# Altium PCB testrack_carrier_debugger.PcbDoc
Units mm, origin at the board's own origin, x right, y up, seen from the top; angles counter-clockwise.
Board outline 172 x 100 mm, 6 copper layers (Top Layer, Signal Layer 1, Signal Layer 2, Signal Layer 3, Signal Layer 4, Bottom Layer), stack 1.54 mm thick; 40 components, 43 nets, 276 pads, 197 vias.
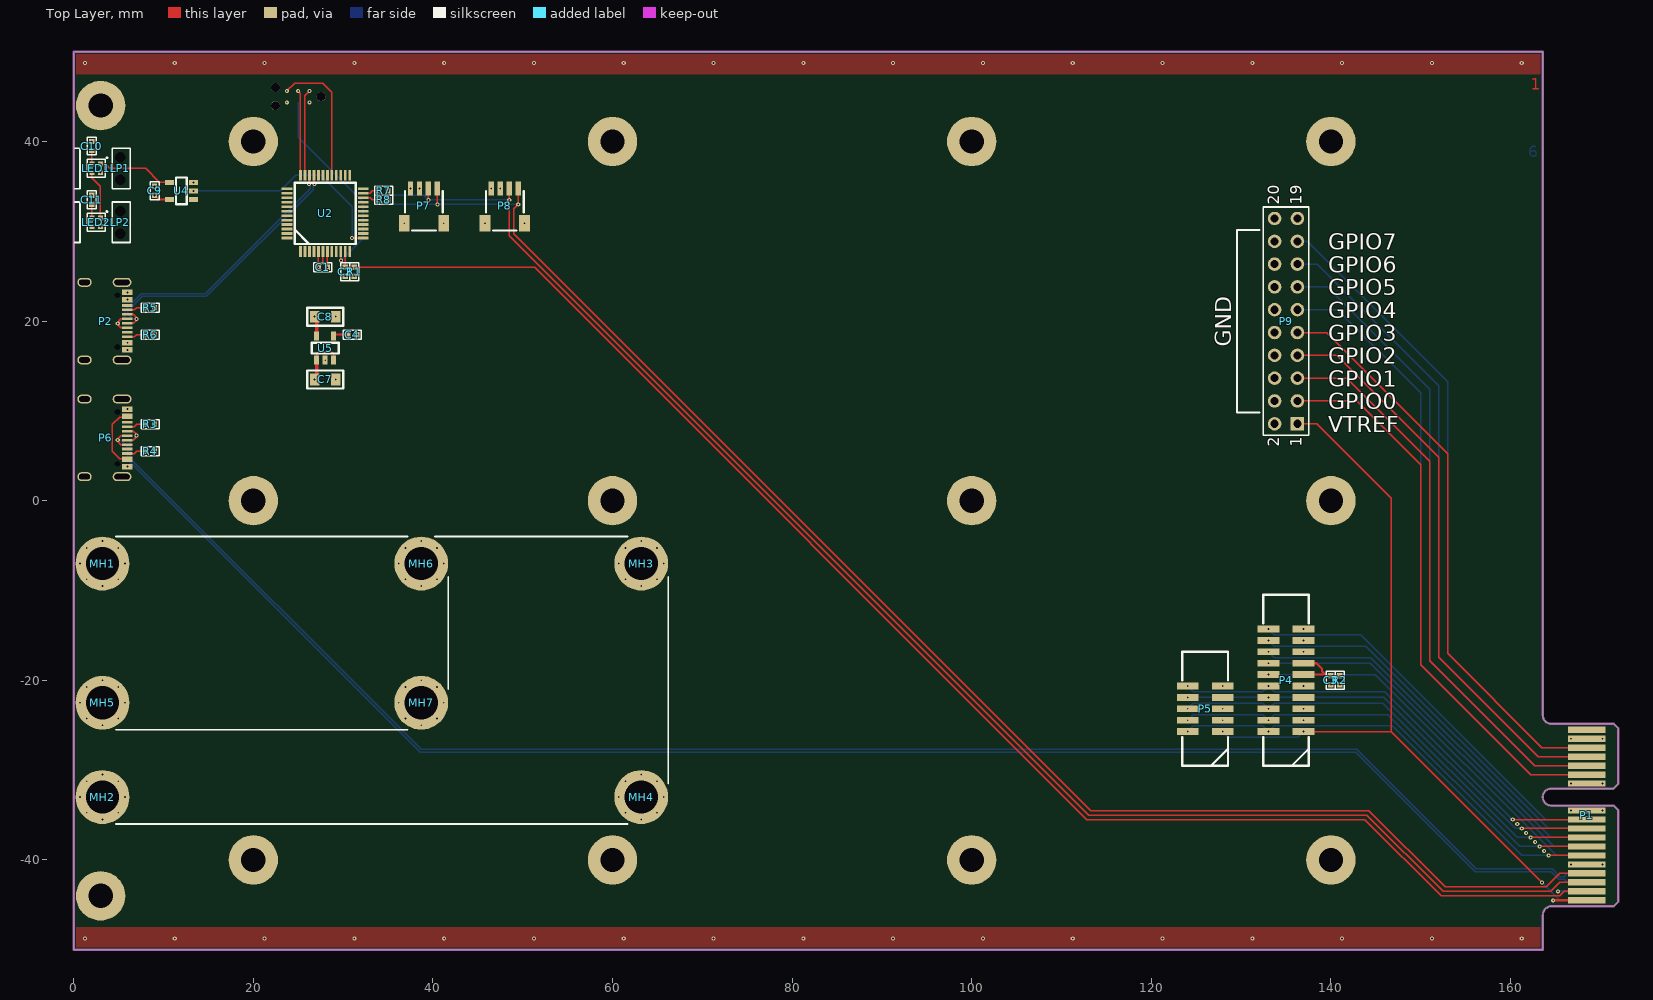
[diagram p0: Top Layer view]
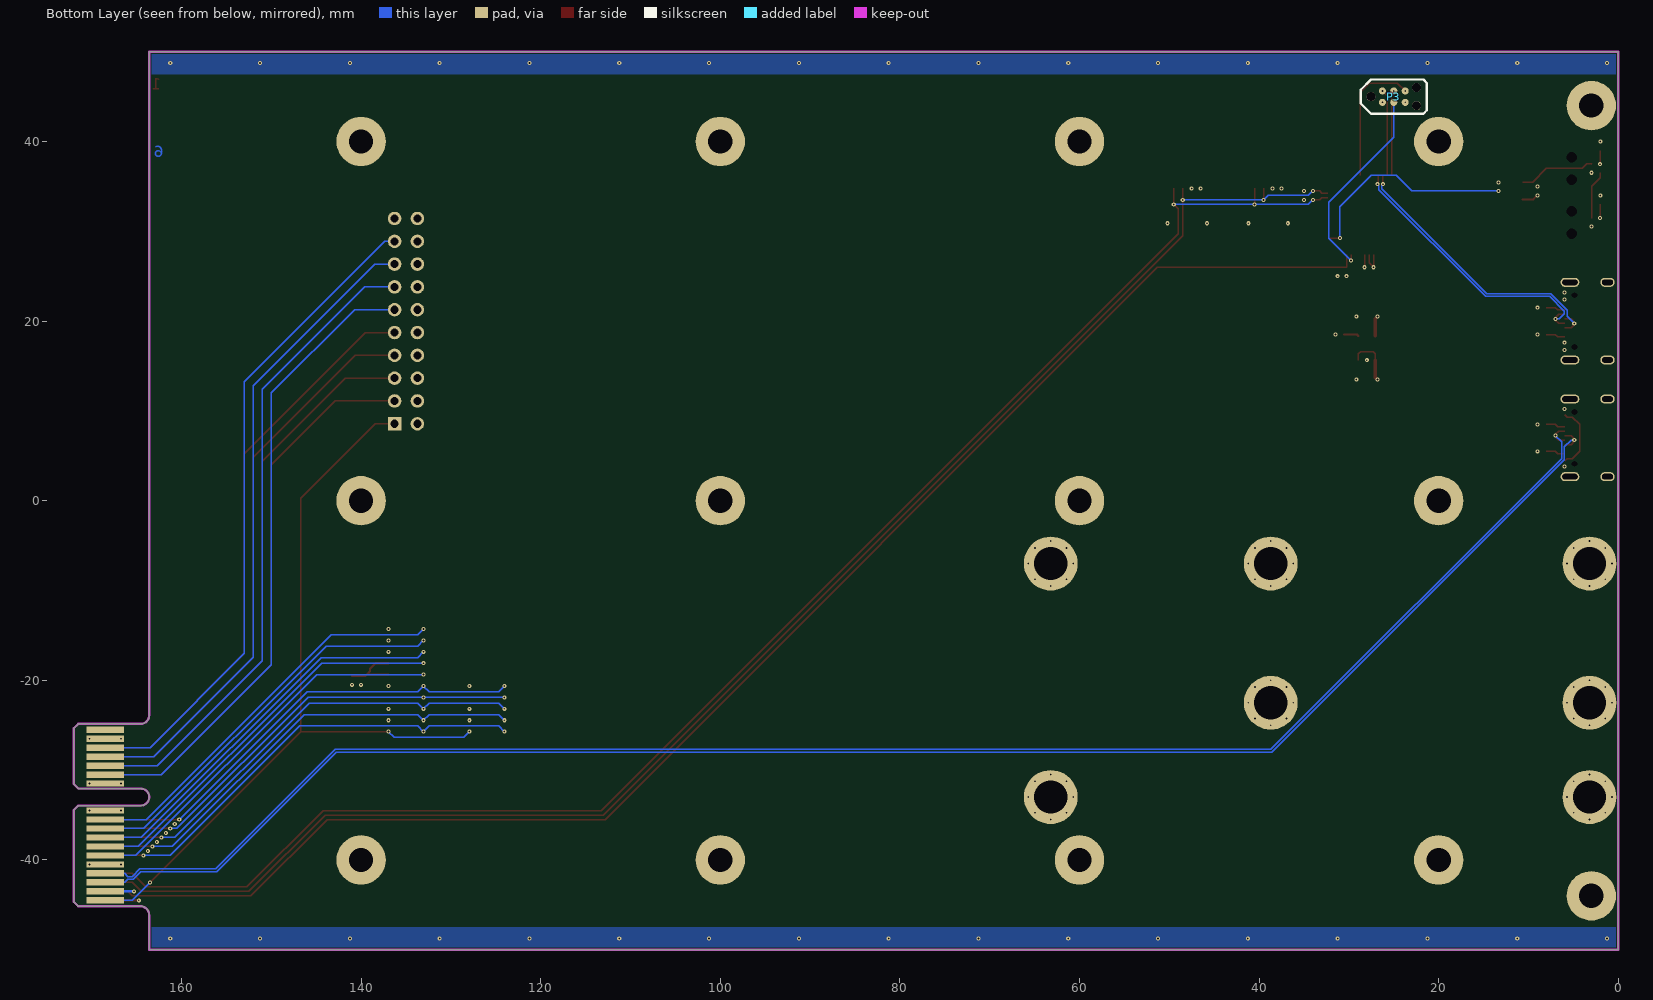
[diagram p1: Bottom Layer view, seen from below]
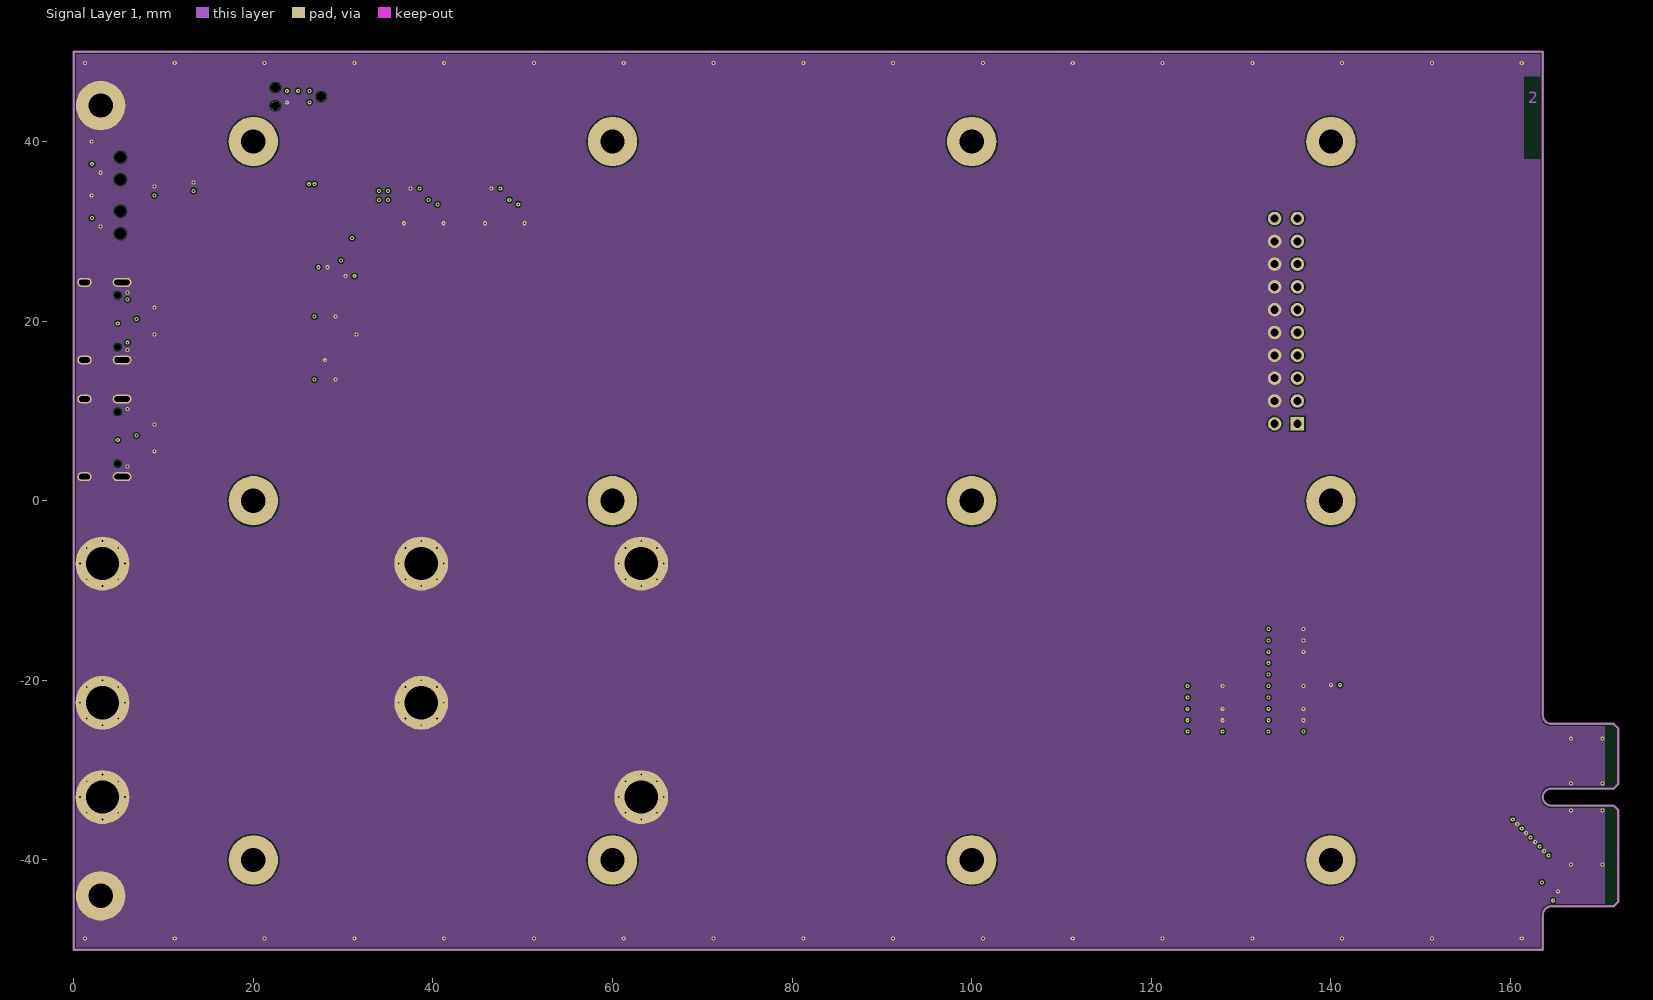
[diagram p2: Signal Layer 1]
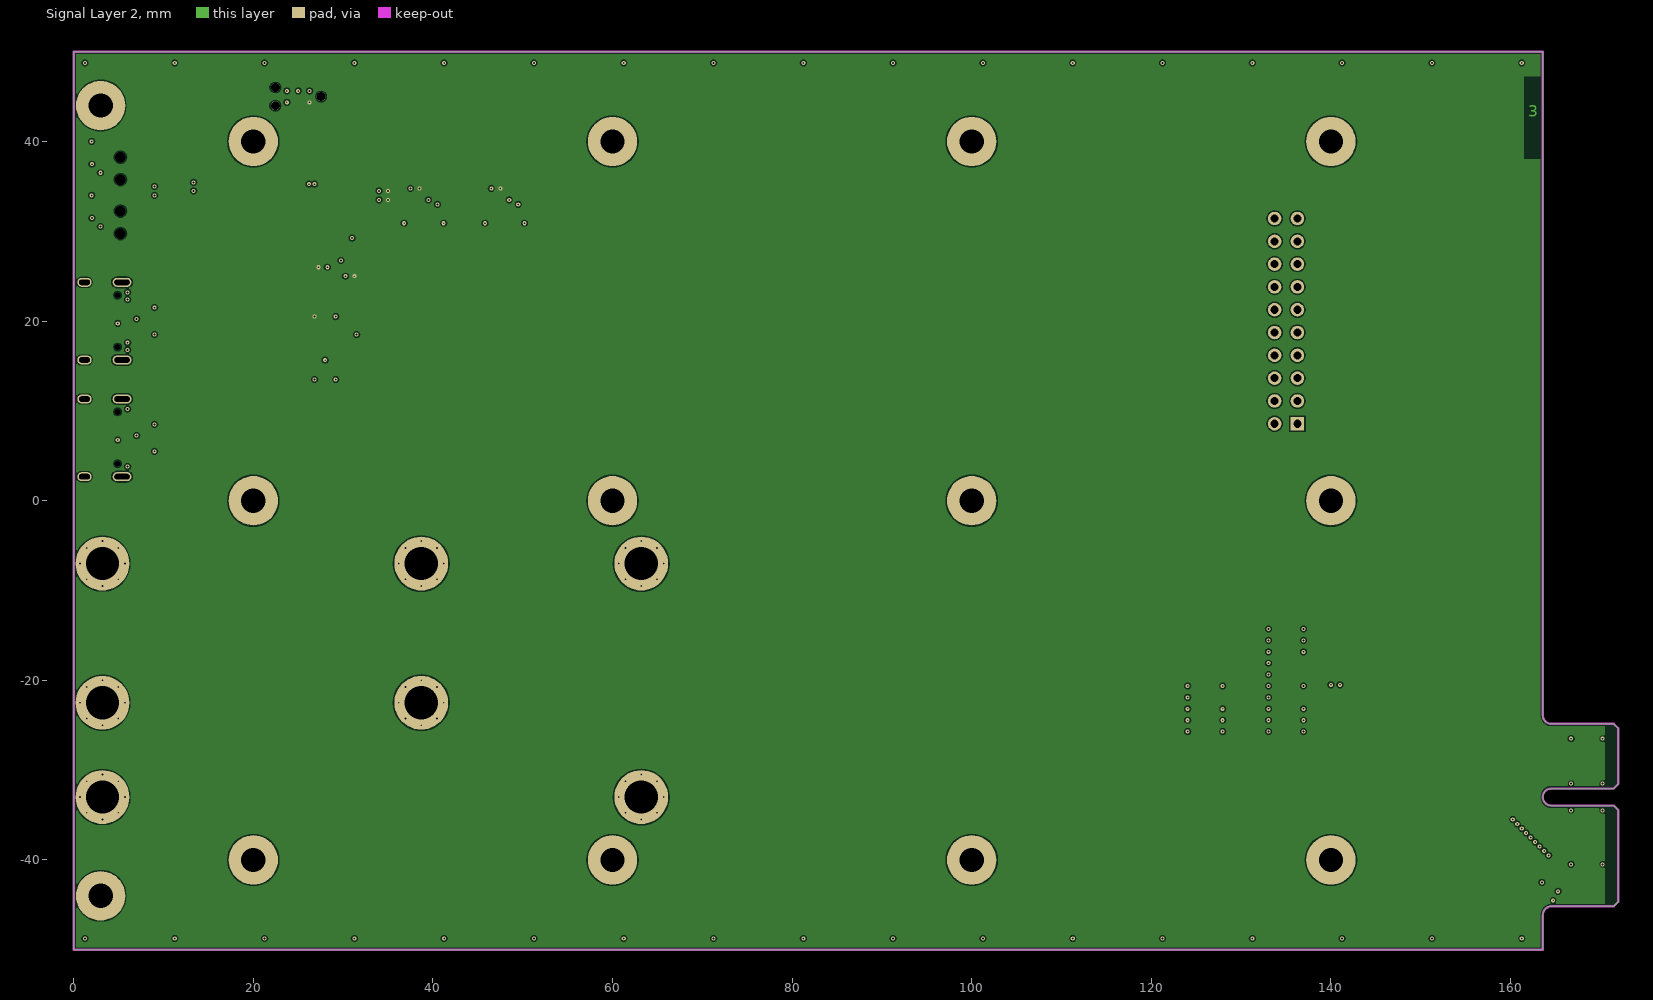
[diagram p3: Signal Layer 2]
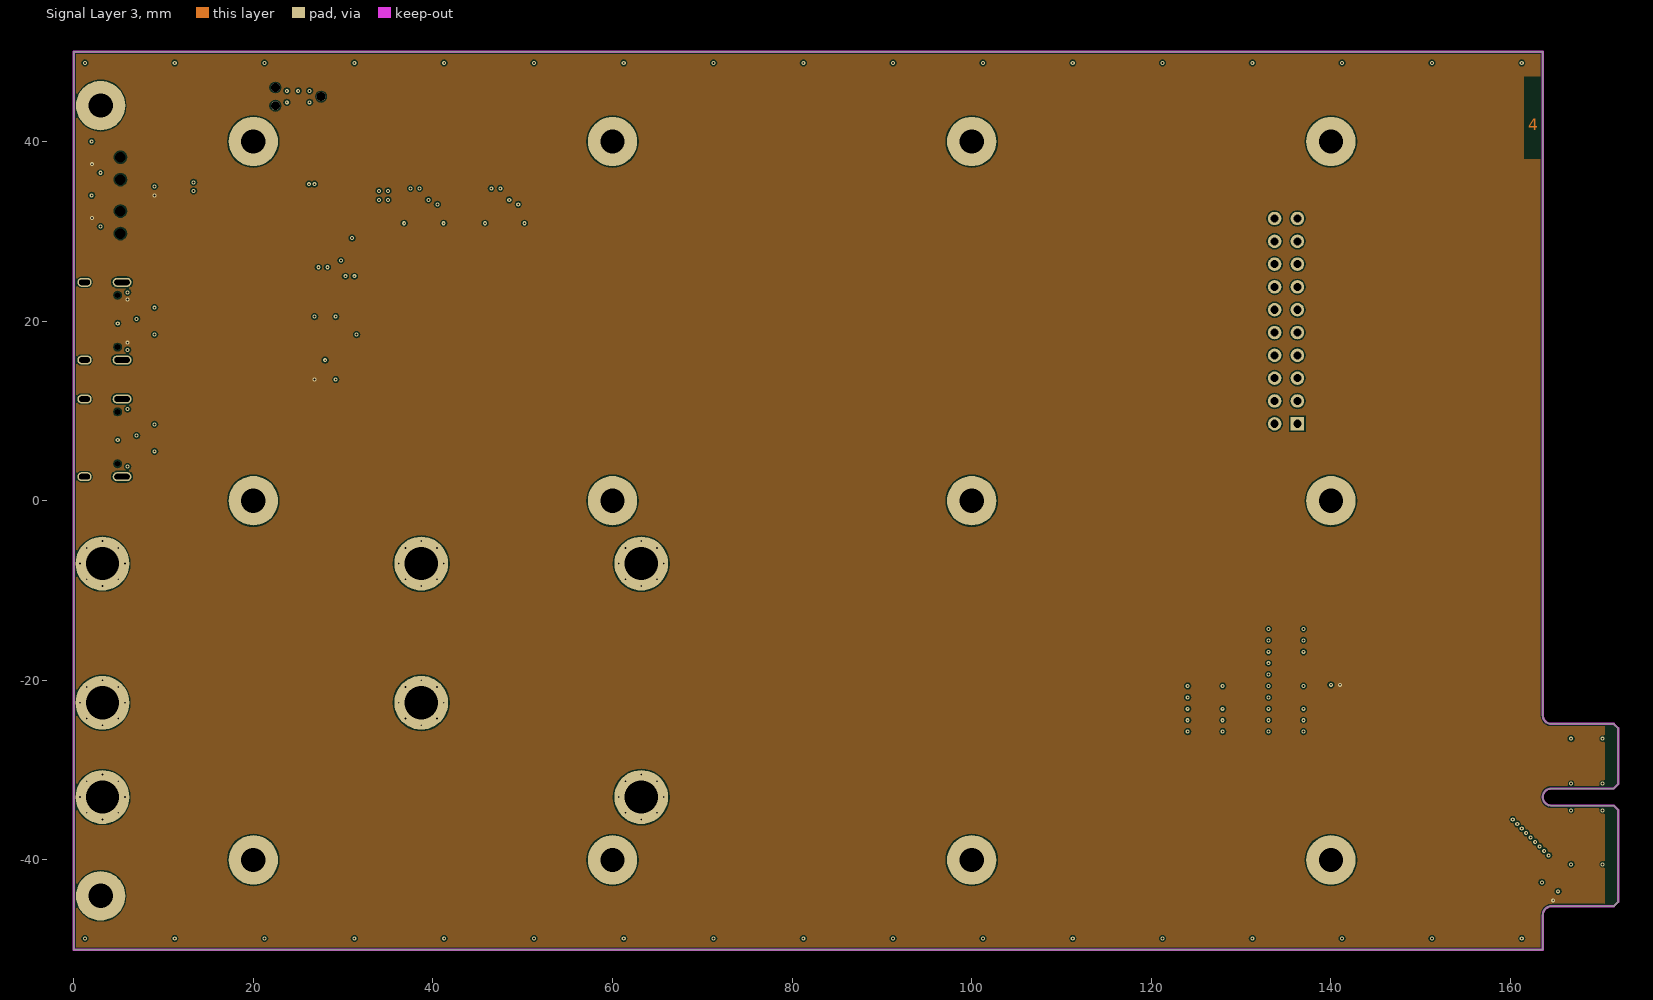
[diagram p4: Signal Layer 3]
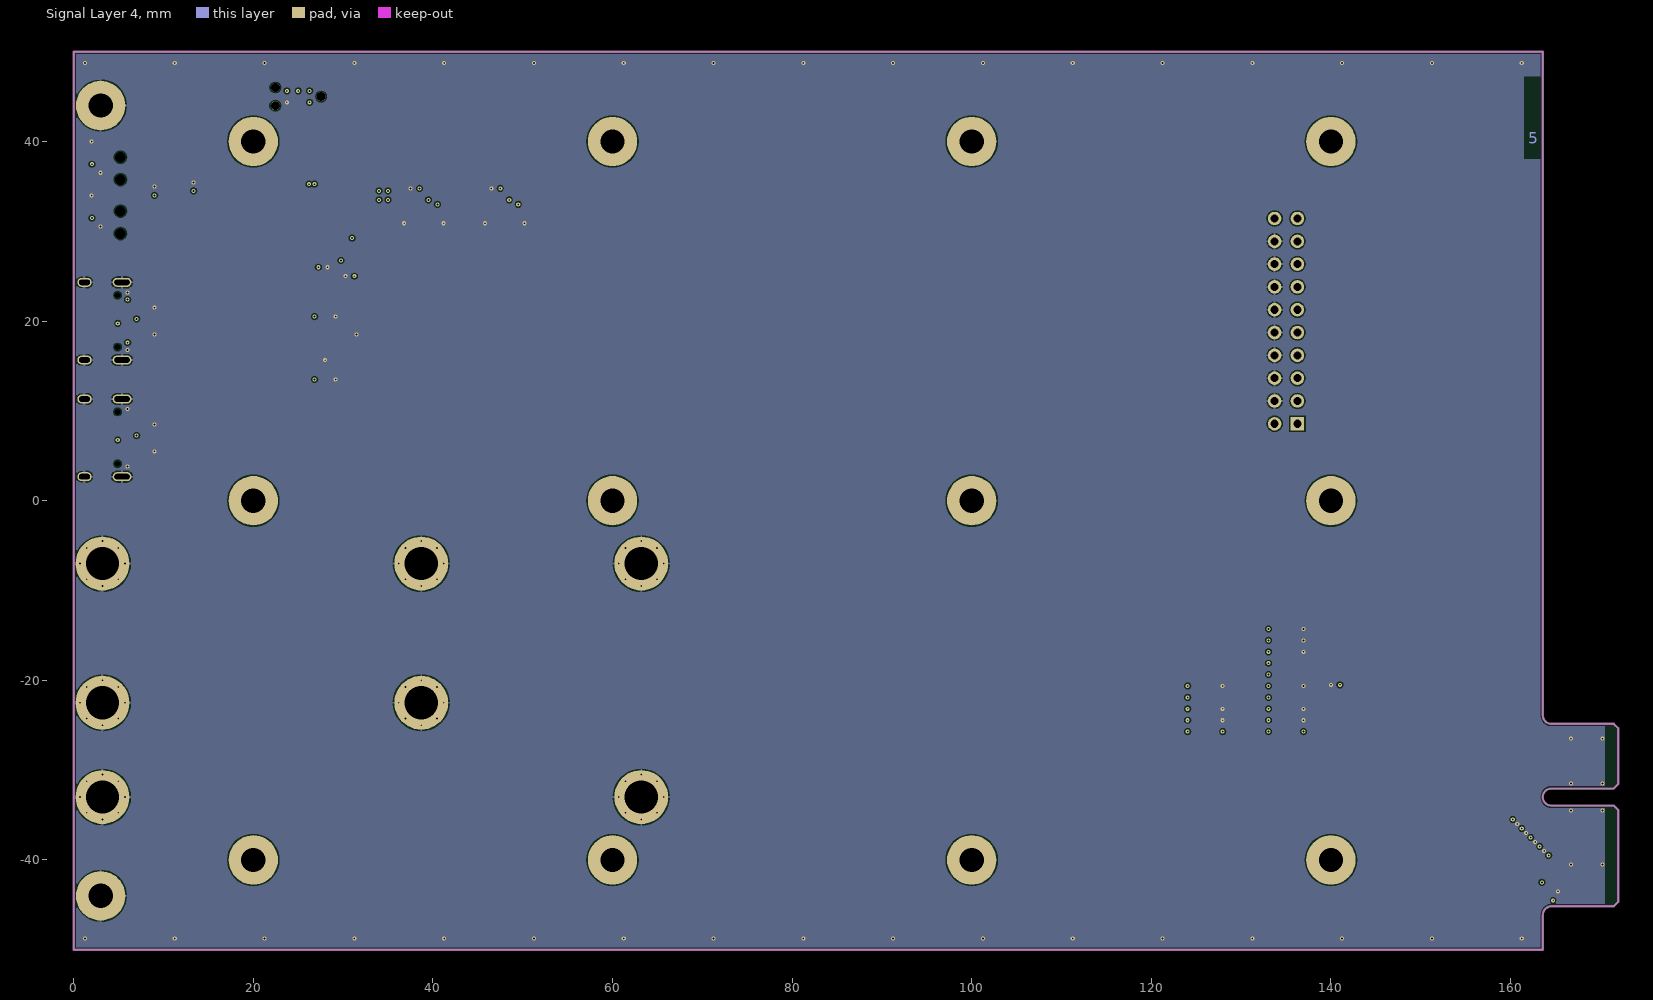
[diagram p5: Signal Layer 4]

## Layer stack, top to bottom
Top Solder: solder mask 0.0102, Solder Resist, Dk 3.5
Top Layer: signal copper 0.0356
Dielectric 1: prepreg 0.0994, Dk 4.2
Signal Layer 1: signal copper 0.0152
Dielectric 3: core 0.55, Dk 4.2
Signal Layer 2: signal copper 0.0152
Dielectric 4: prepreg 0.1088, Dk 4.2
Signal Layer 3: signal copper 0.0152
Dielectric 5: core 0.55, Dk 4.2
Signal Layer 4: signal copper 0.0152
Dielectric 2: prepreg 0.0994, Dk 4.2
Bottom Layer: signal copper 0.0356
Bottom Solder: solder mask 0.0102, Solder Resist, Dk 3.5

## Board outline
163.6,-50 163.6,-46.15 cw(c164.6,-46.15) 164.6,-45.15 171.5,-45.15 172,-44.65 172,-34.45 171.5,-33.95 164.55,-33.95 cw(c164.55,-33) 164.55,-32.05 171.5,-32.05 172,-31.55 172,-25.35 171.5,-24.85 164.55,-24.85 cw(c164.55,-23.9) 163.6,-23.9 163.6,50 0,50 0,-50

## Design rules (kind name [scope] priority, off if disabled: settings)
Clearance Clearance_MountingHole [HasFootprint('WA-SMSI_M2.5') vs OnLayer('Keep-Out Layer')] p1: gap=0
Clearance Clearance_Keepout [IsPad vs OnLayer('Keep-Out Layer')] p2: gap=0
Clearance [All] p3: gap=0.152
ComponentClearance [All] p1: gap=0 collisioncheckmode=3 verticalgap=0.254 showdistances=FALSE
DiffPairsRouting [All] p1: maxlimit=0.254 minlimit=0.152 mostfreqgap=0.152 toplayer_minwidth=0.152 toplayer_maxwidth=0.381 toplayer_prefwidth=0.152 midlayer1_minwidth=0.152 midlayer1_maxwidth=0.381 midlayer1_prefwidth=0.152 midlayer2_minwidth=0.152 midlayer2_maxwidth=0.381 midlayer2_prefwidth=0.152 midlayer3_minwidth=0.152 midlayer3_maxwidth=0.381 midlayer3_prefwidth=0.152 midlayer4_minwidth=0.152 midlayer4_maxwidth=0.381 midlayer4_prefwidth=0.152 bottomlayer_minwidth=0.152 bottomlayer_maxwidth=0.381 bottomlayer_prefwidth=0.152 maxuncoupledlength=12.7
HoleSize [All] p1: absolutevalues=TRUE maxlimit=6.3 minlimit=0.2 maxpercent=80.000 minpercent=20.000
MatchedLengths MatchedLengths_TARGET1 [InNetClass('TRACE') && InNetClass('TARGET1_Nets')] p1: tolerance=1 checknetsindiffpair=TRUE checkdiffpairvsdiffpair=TRUE checkothers=TRUE
MatchedLengths MatchedLengths_TARGET2 [InNetClass('TRACE') && InNetClass('TARGET2_Nets')] p2: tolerance=1 checknetsindiffpair=TRUE checkdiffpairvsdiffpair=TRUE checkothers=TRUE
MatchedLengths MatchedLengths_TARGET3 [InNetClass('TRACE') && InNetClass('TARGET3_Nets')] p3: tolerance=1 checknetsindiffpair=TRUE checkdiffpairvsdiffpair=TRUE checkothers=TRUE
MatchedLengths MatchedLengths_TARGET4 [InNetClass('TRACE') && InNetClass('TARGET4_Nets')] p4: tolerance=1 checknetsindiffpair=TRUE checkdiffpairvsdiffpair=TRUE checkothers=TRUE
MatchedLengths MatchedLengths_TARGET5 [InNetClass('TRACE') && InNetClass('TARGET5_Nets')] p5: tolerance=1 checknetsindiffpair=TRUE checkdiffpairvsdiffpair=TRUE checkothers=TRUE
MatchedLengths MatchedLengths_TARGET6 [InNetClass('TRACE') && InNetClass('TARGET6_Nets')] p6: tolerance=1 checknetsindiffpair=TRUE checkdiffpairvsdiffpair=TRUE checkothers=TRUE
MatchedLengths MatchedLengths_TARGET7 [InNetClass('TRACE') && InNetClass('TARGET7_Nets')] p7: tolerance=1 checknetsindiffpair=TRUE checkdiffpairvsdiffpair=TRUE checkothers=TRUE
MatchedLengths MatchedLengths_TARGET8 [InNetClass('TRACE') && InNetClass('TARGET8_Nets')] p8: tolerance=1 checknetsindiffpair=TRUE checkdiffpairvsdiffpair=TRUE checkothers=TRUE
MatchedLengths MatchedLengths_BACKPLANE [InNetClass('TRACE') && InNetClass('BACKPLANE_Nets')] p9: tolerance=1 checknetsindiffpair=TRUE checkdiffpairvsdiffpair=TRUE checkothers=TRUE
MinimumSolderMaskSliver [All] p1: minsoldermaskwidth=0
PolygonConnect PolygonConnect_via [IsVia] p1: connectstyle=Direct reliefconductorwidth=0.254 reliefentries=4 polygonreliefangle="90 Angle" airgapwidth=0.254
PolygonConnect PolygonConnect_inner [All vs OnLayer('Signal Layer 1')] p2: connectstyle=Direct reliefconductorwidth=0.254 reliefentries=4 polygonreliefangle="90 Angle" airgapwidth=0.254
PolygonConnect [All] p3: connectstyle=Relief reliefconductorwidth=0.254 reliefentries=4 polygonreliefangle="90 Angle" airgapwidth=0.152
RoutingVias [All] p1: holewidth=0.2 width=0.45 viastyle="Through Hole" minholewidth=0.2 minwidth=0.45 maxholewidth=0.711 maxwidth=1.27
SilkToSilkClearance [All] p1: silktosilkclearance=0
SilkToSolderMaskClearance [IsPad] p1: minsilkscreentomaskgap=0 clearancetoexposedcopper=TRUE
SolderMaskExpansion SolderMaskExpansion_via [IsVia] p1: expansion=-0.508
SolderMaskExpansion [All] p2: expansion=0.05
Width [All] p1: maxlimit=1.27 minlimit=0.152 preferedwidth=0.152
24 further rules are at their usual default settings.

## Classes and differential pairs
component class top: MH1 MH2 MH3 MH4 MH5 MH6 MH7
component class CONNECTORS: C3 P4 P5 P6 P7 P8 P9 R2 R3 R4
component class BACKPLANE: P1
component class MGMT: C1 C2 C4 C7 C8 C9 C10 C11 LED1 LED2 LP1 LP2 P2 P3 R1 R5 R6 R7 R8 U2 U4 U5
net class BACKPLANE_Nets: ADDR D_N D_P GND GPIO0 GPIO1 GPIO2 GPIO3 GPIO4 GPIO5 GPIO6 GPIO7 JTCK JTDI JTDO JTMS MGMT_SCL MGMT_SDA NetP1_A18 NetP1_B18 NRST TRACECLK TRACED0 TRACED1 TRACED2 TRACED3 V5 VTREF
net class TRACE: TRACECLK TRACED0 TRACED1 TRACED2 TRACED3
differential pair D: +D_P -D_N
differential pair M_USB_D: +M_USB_D_P -M_USB_D_N

## Components (designator, comment, footprint, x,y, rotation, side; value= is the part's Value field where it differs from the comment)
C1 "100nF" 0402 27.75,26 r180 top
C2 "100nF" 0402 30.25,25.5 r90 top
C3 "100nF" 0402 140,-20 r90 top
C4 "100nF" 0402 31,18.5 r180 top
C7 "22uF" 0805 28,13.5 r180 top
C8 "22uF" 0805 28,20.5 r180 top
C9 "100nF" 0402 9,34.5 r270 top
C10 "100nF" 0402 2,39.5 r270 top
C11 "100nF" 0402 2,33.5 r270 top
LED1 "SK6805" EC15 2.5,37 r180 top locked
LED2 "SK6805" EC15 2.5,31 r180 top locked
LP1 "Lightpipe" SLP3-150-100-F 2.5,37 r270 top
LP2 "Lightpipe" SLP3-150-100-F 2.5,31 r270 top
MH1 "Mounting_Hole" WA-SMSI_M2.5 3.2,-7 r90 top
MH2 "Mounting_Hole" WA-SMSI_M2.5 3.2,-33 r90 top
MH3 "Mounting_Hole" WA-SMSI_M2.5 63.2,-7 r90 top
MH4 "Mounting_Hole" WA-SMSI_M2.5 63.2,-33 r90 top
MH5 "Mounting_Hole" WA-SMSI_M2.5 3.2,-22.5 r90 top
MH6 "Mounting_Hole" WA-SMSI_M2.5 38.7,-7 r90 top
MH7 "Mounting_Hole" WA-SMSI_M2.5 38.7,-22.5 r90 top
P1 "PCIE_X1" PCIE_X1_EDGE 163.6,-33 r90 top locked
P2 "USBC" U262-161N-4BVC11 1.2,20 r270 top
P3 "SWD-TC2030" TC2030-NL 25,45 r180 bottom
P4 "SWD-TRACE-FTSH110" FTSH110 135,-20 r90 top
P5 "SWD-FTSH105" FTSH105 126,-23.175 r90 top
P6 "USBC" U262-161N-4BVC11 1.2,7 r270 top
P7 "SH4_I2C" SM04B 39,30 r0 top
P8 "SH4_I2C" SM04B 48,30 r0 top
P9 "Header 10X2" HDR2X10 136.27,8.57 r90 top
R1 "10k" 0402 31.25,25.5 r270 top
R2 "NP" 0402 141,-20 r270 top
R3 "5.1k" 0402 8.5,8.5 r180 top
R4 "5.1k" 0402 8.5,5.5 r180 top
R5 "5.1k" 0402 8.5,21.5 r180 top
R6 "5.1k" 0402 8.5,18.5 r180 top
R7 "2k" 0402 34.5,34.5 r0 top
R8 "2k" 0402 34.5,33.5 r0 top
U2 "STM32G0B1C" QFP48 28,32 r0 top
U4 "SN74LV1T34" SOT23-5 12,34.5 r90 top
U5 "RT9193-33" SOT23-5 28,17 r0 top

## Footprints (in the part's own frame and the unit in brackets; to place one, negate y for a bottom-side part, rotate by r counter-clockwise, add the part's x,y. Pads: shape width x height; smd on the part's side, far side on the other; paste and mask are expansions set on the pad)
0402 [mm]
  rect 0.6x0.6 smd: 1(-0.5,0) 2(0.5,0)
  silkscreen extent -1,-0.5 1,0.5, body extent -0.5,-0.25 0.5,0.25, height 0.4
0805 [mm]
  rect 1.05x1.3 smd: 1(-1.175,0) 2(1.175,0)
  silkscreen extent -2,-1 2,1, body extent -1,-0.63 1,0.63, height 0.8
EC15 [mm] "1.5x1.5mm Addressable LED"
  rect 0.55x0.55 smd: 1(-0.475,-0.475) 2(0.475,-0.475) 3(0.475,0.475) 4(-0.475,0.475)
  silkscreen extent -1.22,-1.22 1,1, body extent -0.75,-0.75 0.75,0.75, height 0.65
FTSH105 [mm]
  rect 0.76x2.4 smd: 1(-2.54,-1.95) 2(-2.54,1.95) 3(-1.27,-1.95) 4(-1.27,1.95) 5(0,-1.95) 6(0,1.95) 7(1.27,-1.95) 8(1.27,1.95) 9(2.54,-1.95) 10(2.54,1.95)
  silkscreen extent -6.35,-2.54 6.35,2.54
FTSH110 [mm]
  rect 0.76x2.4 smd: 1(-5.715,-1.95) 2(-5.715,1.95) 3(-4.445,-1.95) 4(-4.445,1.95) 5(-3.175,-1.95) 6(-3.175,1.95) 7(-1.905,-1.95) 8(-1.905,1.95) 9(-0.635,-1.95) 10(-0.635,1.95) 11(0.635,-1.95) 12(0.635,1.95) 13(1.905,-1.95) 14(1.905,1.95) 15(3.175,-1.95) 16(3.175,1.95) 17(4.445,-1.95) 18(4.445,1.95) 19(5.715,-1.95) 20(5.715,1.95)
  silkscreen extent -9.53,-2.54 9.53,2.54
HDR2X10 [mm] "Connector; Header; 10x2 Position"
  rect 1.5x1.5 hole 0.9: 1(0,0)
  round 1.5 hole 0.9: 2(0,2.54) 3(2.54,0) 4(2.54,2.54) 5(5.08,0) 6(5.08,2.54) 7(7.62,0) 8(7.62,2.54) 9(10.16,0) 10(10.16,2.54) 11(12.7,0) 12(12.7,2.54) 13(15.24,0) 14(15.24,2.54) 15(17.78,0) 16(17.78,2.54) 17(20.32,0) 18(20.32,2.54) 19(22.86,0) 20(22.86,2.54)
  silkscreen extent -1.27,-1.27 24.13,3.81
PCIE_X1_EDGE [mm]
  rect 0.7x4.2 smd far side paste-1: A1(-11.5,-4.9) A2(-10.5,-4.9) A3(-9.5,-4.9) A4(-8.5,-4.9) A5(-7.5,-4.9) A6(-6.5,-4.9) A7(-5.5,-4.9) A8(-4.5,-4.9) A9(-3.5,-4.9) A10(-2.5,-4.9) A11(-1.5,-4.9) A12(1.5,-4.9) A13(2.5,-4.9) A14(3.5,-4.9) A15(4.5,-4.9) A16(5.5,-4.9) A17(6.5,-4.9) A18(7.5,-4.9)
  rect 0.7x4.2 smd paste-1: B1(-11.5,-4.9) B2(-10.5,-4.9) B3(-9.5,-4.9) B4(-8.5,-4.9) B5(-7.5,-4.9) B6(-6.5,-4.9) B7(-5.5,-4.9) B8(-4.5,-4.9) B9(-3.5,-4.9) B10(-2.5,-4.9) B11(-1.5,-4.9) B12(1.5,-4.9) B13(2.5,-4.9) B14(3.5,-4.9) B15(4.5,-4.9) B16(5.5,-4.9) B17(6.5,-4.9) B18(7.5,-4.9)
QFP48 [mm]
  rect 0.3x1.2 smd: 1(-2.75,-4.25) 2(-2.25,-4.25) 3(-1.75,-4.25) 4(-1.25,-4.25) 5(-0.75,-4.25) 6(-0.25,-4.25) 7(0.25,-4.25) 8(0.75,-4.25) 9(1.25,-4.25) 10(1.75,-4.25) 11(2.25,-4.25) 12(2.75,-4.25) 25(2.75,4.25) 26(2.25,4.25) 27(1.75,4.25) 28(1.25,4.25) 29(0.75,4.25) 30(0.25,4.25) 31(-0.25,4.25) 32(-0.75,4.25) 33(-1.25,4.25) 34(-1.75,4.25) 35(-2.25,4.25) 36(-2.75,4.25)
  rect 1.2x0.3 smd: 13(4.25,-2.75) 14(4.25,-2.25) 15(4.25,-1.75) 16(4.25,-1.25) 17(4.25,-0.75) 18(4.25,-0.25) 19(4.25,0.25) 20(4.25,0.75) 21(4.25,1.25) 22(4.25,1.75) 23(4.25,2.25) 24(4.25,2.75) 37(-4.25,2.75) 38(-4.25,2.25) 39(-4.25,1.75) 40(-4.25,1.25) 41(-4.25,0.75) 42(-4.25,0.25) 43(-4.25,-0.25) 44(-4.25,-0.75) 45(-4.25,-1.25) 46(-4.25,-1.75) 47(-4.25,-2.25) 48(-4.25,-2.75)
  silkscreen extent -3.4,-3.4 3.4,3.4
SLP3-150-100-F [mm] "Lightpipe, 3mm, right angle"
  round 0 hole 1.168 unplated: ""(-1.25,2.7) ""(1.25,2.7)
  silkscreen extent -2.25,-2.37 2.25,3.8
SM04B [mm]
  rect 0.6x1.55 smd: 1(-1.5,4.775) 2(-0.5,4.775) 3(0.5,4.775) 4(1.5,4.775)
  rect 1.2x1.8 smd: SH(-2.2,0.9) SH(2.2,0.9)
  silkscreen extent -2.1,0.1 2.1,4.5
SOT23-5 [mm]
  rect 0.55x1 smd: 1(-0.95,-1.35) 2(0,-1.35) 3(0.95,-1.35) 4(0.95,1.35) 5(-0.95,1.35)
  silkscreen extent -1.5,-0.6 1.5,0.6
TC2030-NL [mil] "Tag-Connect 2x3"
  round 31 smd paste-31: 1(-50,-25) 2(-50,25) 3(0,-25) 4(0,25) 5(50,-25) 6(50,25)
  round 39.02 hole 39 unplated: ""(-100,0) ""(100,-40) ""(100,40)
  silkscreen extent -145,-75 145,75
U262-161N-4BVC11 [mm]
  rect 0.3x1.15 smd: A1(-3.35,4.745) A4(-2.55,4.745) A5(-1.25,4.745) A6(-0.25,4.745) A7(0.25,4.745) A8(1.25,4.745) A9(2.55,4.745) A12(3.35,4.745) B1(3.05,4.745) B4(2.25,4.745) B5(1.75,4.745) B6(0.75,4.745) B7(-0.75,4.745) B8(-1.75,4.745) B9(-2.25,4.745) B12(-3.05,4.745)
  oval 1x2.1 hole 0.6 slot 1.7 at 90 deg: SH(-4.32,4.18) SH(4.32,4.18)
  oval 1x1.6 hole 0.6 slot 1.2 at 90 deg: SH(-4.32,0) SH(4.32,0)
  rect 0x0 hole 0.65 unplated: ""(-2.89,3.68) ""(2.89,3.68)
  body extent -4.48,-2.6 4.46,5.01, height 3.35
WA-SMSI_M2.5 [mm] "Solder in standoff, M2.5"
  round 6 hole 3.7 unplated: 1(0,0)

## Part data
C1 C2 C3 C4 C7 C8 C9 C10 C11: library part Capacitor
P7 P8: "Qwiic / STEMMA QT Compatible"
P9: "Header, 10-Pin, Dual row"
R1 R2 R3 R4 R5 R6 R7 R8: library part Resistor
U4: "Single Power Supply Single Buffer GATE CMOS Logic Level Shifter"
U5: library part VREG_EN_BP

## Free pads (board coordinates)
  round 5.5 hole 2.7: ""(3,-44) ""(3,44) ""(20,-40) ""(20,0) ""(20,40) ""(60,-40) ""(60,0) ""(60,40) ""(100,-40) ""(100,0) ""(100,40) ""(140,-40) ""(140,0) ""(140,40)

## Via types
v1: diameter 0.45, hole 0.2, Top Layer to Bottom Layer, 197 vias

## Nets (pads, with @x,y where several pads share a name; then routed paths per layer and width w, separated by ;. In a path a pad name is that pad's centre, name@x,y a point inside that pad or via, vN(x,y) a via of type N, cw(c..) or ccw(c..) an arc to the next point about the centre after c; other vN are vias at no path point)
ADDR: C2.2 P1.B2 R1.1 U2.11 | length 168.8
  Top Layer w0.152: U2.11@30.25,27.375 C2.2 R1.1 51.326,26 112.826,-35.5 143.793,-35.5 152.293,-44 165.5,-44 166,-43.5 P1.B2
D_N: P1.A4 P6.A7 P6.B7 | length 187.2
  Top Layer w0.152: P6.A7 6.65,6.75 7,7.1 v1(7,7.25) 7,7.4 6.65,7.75 P6.B7
  Bottom Layer w0.152: v1(7,7.25) 6.3,6.55 6.3,4.7 38.695,-27.695 142.895,-27.695 156.2,-41 164.652,-41 165.5,-41.848 165.976,-41.848 166.324,-41.5 P1.A4
D_P: P1.A3 P6.A6 P6.B6 | length 187.5
  Top Layer w0.152: P6.B6 5.25,6.25 4.9,6.6 v1(4.9,6.75) 4.9,6.9 5.25,7.25 P6.A6
  Bottom Layer w0.152: v1(4.9,6.75) 5.245,6.75 5.995,6 5.995,4.574 38.569,-28 142.769,-28 156.074,-41.305 164.526,-41.305 165.374,-42.152 165.976,-42.152 166.324,-42.5 P1.A3
GND: C1.1 C2.1 C3.1 C4.1 C7.1 C8.1 C9.1 C10.1 C11.1 LED1.4 LED2.4 MH1.1 MH2.1 MH3.1 MH4.1 MH5.1 MH6.1 MH7.1 P1.A2 P1.A5 P1.A11 P1.A12 P1.A17 P1.B5 P1.B11 P1.B12 P1.B17 P2.A1 P2.A12 P2.B1 P2.B12 P2.SH P3.5 P4.3 P4.5 P4.9 P4.15 P4.17 P4.19 P5.3 P5.5 P5.9 P6.A1 P6.A12 P6.B1 P6.B12 P6.SH P7.1 P7.SH P8.1 P8.SH P9.4 P9.6 P9.8 P9.10 P9.12 P9.14 P9.16 P9.18 pad.@3,44 pad.@3,-44 R3.1 R4.1 R5.1 R6.1 U2.7 U4.3 U5.2 | length 4.6
  Top Layer w0.152: v1(28.25,26) U2.7@28.25,27.375
  Bottom Layer w0.3: v1(165.3,-43.5) P1.A2
  other v1: 1.25,-48.75 11.25,-48.75 21.25,-48.75 31.25,-48.75 41.25,-48.75 51.25,-48.75 61.25,-48.75 71.25,-48.75 81.25,-48.75 91.25,-48.75 101.25,-48.75 111.25,-48.75 121.25,-48.75 131.25,-48.75 141.25,-48.75 151.25,-48.75 161.25,-48.75 166.75,-40.5 170.25,-40.5 163.75,-39 162.75,-38 161.75,-37 160.75,-36 3.2,-35.5 63.2,-35.5 1.45,-34.75 4.95,-34.75 61.45,-34.75 64.95,-34.75 166.75,-34.5 170.25,-34.5 0.7,-33 5.7,-33 60.7,-33 65.7,-33 166.75,-31.5 170.25,-31.5 1.45,-31.25 4.95,-31.25 61.45,-31.25 64.95,-31.25 3.2,-30.5 63.2,-30.5 166.75,-26.5 170.25,-26.5 3.2,-25 38.7,-25 127.95,-24.445 136.95,-24.445 1.45,-24.25 4.95,-24.25 36.95,-24.25 40.45,-24.25 127.95,-23.175 136.95,-23.175 0.7,-22.5 5.7,-22.5 36.2,-22.5 41.2,-22.5 1.45,-20.75 4.95,-20.75 36.95,-20.75 40.45,-20.75 127.95,-20.635 136.95,-20.635 140,-20.5 3.2,-20 38.7,-20 136.95,-16.825 136.95,-15.555 136.95,-14.285 3.2,-9.5 38.7,-9.5 63.2,-9.5 1.45,-8.75 4.95,-8.75 36.95,-8.75 40.45,-8.75 61.45,-8.75 64.95,-8.75 0.7,-7 5.7,-7 36.2,-7 41.2,-7 60.7,-7 65.7,-7 1.45,-5.25 4.95,-5.25 36.95,-5.25 40.45,-5.25 61.45,-5.25 64.95,-5.25 3.2,-4.5 38.7,-4.5 63.2,-4.5 6,3.8 9,5.5 9,8.5 6,10.2 29.175,13.5 28,15.65 6,16.8 9,18.5 31.5,18.5 29.175,20.5 9,21.5 6,23.2 30.25,25 2.975,30.525 36.8,30.9 41.2,30.9 45.8,30.9 50.2,30.9 2,34 37.5,34.775 46.5,34.775 9,35 13.35,35.45 2.975,36.525 2,40 23.73,44.365 1.25,48.75 11.25,48.75 21.25,48.75 31.25,48.75 41.25,48.75 51.25,48.75 61.25,48.75 71.25,48.75 81.25,48.75 91.25,48.75 101.25,48.75 111.25,48.75 121.25,48.75 131.25,48.75 141.25,48.75 151.25,48.75 161.25,48.75
GPIO0: P1.B13 P9.3 | length 62.5
  Top Layer w0.152: P9.3 142.89,11.11 150,4 150,-18.243 162.257,-30.5 P1.B13
GPIO1: P1.B14 P9.5 | length 63.1
  Top Layer w0.152: P9.5 141.764,13.65 151,4.414 151,-17.828 162.672,-29.5 P1.B14
GPIO2: P1.B15 P9.7 | length 63.8
  Top Layer w0.152: P9.7 140.638,16.19 152,4.828 152,-17.414 163.086,-28.5 P1.B15
GPIO3: P1.B16 P9.9 | length 64.4
  Top Layer w0.152: P9.9 139.513,18.73 153,5.243 153,-17 163.5,-27.5 P1.B16
GPIO4: P1.A13 P9.11 | length 71.4
  Bottom Layer w0.152: P9.11 140.73,21.27 150,12 150,-18.243 162.257,-30.5 P1.A13
GPIO5: P1.A14 P9.13 | length 72
  Bottom Layer w0.152: P9.13 139.604,23.81 151,12.414 151,-17.828 162.672,-29.5 P1.A14
GPIO6: P1.A15 P9.15 | length 72.7
  Bottom Layer w0.152: P9.15 138.478,26.35 152,12.828 152,-17.414 163.086,-28.5 P1.A15
GPIO7: P1.A16 P9.17 | length 73.3
  Bottom Layer w0.152: P9.17 137.353,28.89 153,13.243 153,-17 163.5,-27.5 P1.A16
JTCK: P1.B7 P4.4 P5.4 | length 51.3
  Top Layer w0.152: v1(163.25,-38.5) P1.B7
  Bottom Layer w0.152: v1(124.05,-24.445) 124.685,-23.81 132.415,-23.81 v1(133.05,-24.445) 133.685,-23.81 146.314,-23.81 161.004,-38.5 v1(163.25,-38.5)
JTDI: P1.B9 P4.8 P5.8 | length 50.5
  Top Layer w0.152: v1(161.25,-36.5) P1.B9
  Bottom Layer w0.152: v1(124.05,-21.905) v1(133.05,-21.905) 145.905,-21.905 160.5,-36.5 v1(161.25,-36.5)
JTDO: P1.B8 P4.6 P5.6 | length 51.4
  Top Layer w0.152: v1(162.25,-37.5) P1.B8
  Bottom Layer w0.152: v1(124.05,-23.175) 124.685,-22.54 132.415,-22.54 v1(133.05,-23.175) 133.685,-22.54 145.79,-22.54 160.75,-37.5 v1(162.25,-37.5)
JTMS: P1.B6 P4.2 P5.2 | length 51.2
  Top Layer w0.152: v1(164.25,-39.5) P1.B6
  Bottom Layer w0.152: v1(124.05,-25.715) 124.685,-25.08 132.415,-25.08 v1(133.05,-25.715) 133.685,-25.08 146.83,-25.08 161.25,-39.5 v1(164.25,-39.5)
LEDS: U2.13 U4.2 | length 24.6
  Top Layer w0.152: v1(31,29.25) U2.13
  Bottom Layer w0.152: v1(13.35,34.5) 23,34.5 24.75,36.25 27.5,36.25 31,32.75 v1(31,29.25)
M_NRST: P3.3 U2.10 | length 22.3
  Top Layer w0.152: v1(29.75,26.75) U2.10@29.75,27.375
  Bottom Layer w0.152: P3.3 25,40.5 32.25,33.25 32.25,29.25 v1(29.75,26.75)
M_USB_D_N: P2.A7 P2.B7 U2.33 | length 32.2
  Top Layer w0.152: P2.A7 6.65,19.75 7,20.1 v1(7,20.25) 7,20.4 6.65,20.75 P2.B7 ; U2.33 26.75,35.301 v1(26.801,35.25)
  Bottom Layer w0.152: v1(7,20.25) 6.55,20.25 6,20.8 6,21.1 7.65,22.75 14.779,22.75 26.652,34.624 26.652,35.101 v1(26.801,35.25)
M_USB_D_P: P2.A6 P2.B6 U2.34 | length 32.3
  Top Layer w0.152: P2.B6 5.25,19.25 4.9,19.6 v1(4.9,19.75) 4.9,19.9 5.25,20.25 P2.A6 ; v1(26.199,35.25) 26.25,35.301 U2.34
  Bottom Layer w0.152: v1(4.9,19.75) 5.695,20.545 5.695,21.226 7.524,23.055 14.652,23.055 26.348,34.75 26.348,35.101 v1(26.199,35.25)
MGMT_SCL: P1.B4 P7.4 P8.4 R8.1 U2.22 | length 174.7
  Top Layer w0.152: U2.22@32.375,33.75 33,33.75 33.25,33.5 v1(34,33.5) ; v1(40.5,33) P7.4 ; P8.4 v1(49.5,33) 49,32.5 49,29.74 113.24,-34.5 144.207,-34.5 152.707,-43 164,-43 165.5,-41.5 P1.B4
  Bottom Layer w0.152: v1(34,33.5) 34.5,33 v1(40.5,33) v1(49.5,33)
MGMT_SDA: P1.B3 P7.3 P8.3 R7.1 U2.23 | length 173.8
  Top Layer w0.152: U2.23@32.375,34.25 33,34.25 33.25,34.5 v1(34,34.5) ; v1(39.5,33.5) P7.3 ; P8.3 v1(48.5,33.5) 48.5,29.533 113.033,-35 144,-35 152.5,-43.5 164.5,-43.5 165.5,-42.5 P1.B3
  Bottom Layer w0.152: v1(34,34.5) 34.5,34 39,34 v1(39.5,33.5) v1(48.5,33.5)
NetC3_2: C3.2 P4.11 P4.13 R2.1 | length 7.2
  Top Layer w0.25: P4.11 139.365,-19.365 ; P4.13 138.395,-18.095 139,-18.7 139,-19 139.365,-19.365 ; R2.1 C3.2 139.5,-19.5 139.365,-19.365
NetC4_2: C4.2 U5.4 | length 1.6
  Top Layer w0.254: U5.4 29.1,18.5 C4.2
NetLED1_1: LED1.1 U4.4 | length 8.5
  Top Layer w0.152: LED1.1 3,37.5 3.5,37.5 4,37 8,37 9.55,35.45 U4.4
NetLED1_3: LED1.3 LED2.1 | length 5.4
  Top Layer w0.152: LED1.3 2.025,35.975 2.975,35.025 LED2.1
NetP2_A5: P2.A5 R5.2 | length 2.2
  Top Layer w0.152: P2.A5 6.75,21.25 7,21.5 R5.2
NetP2_B5: P2.B5 R6.2 | length 2.2
  Top Layer w0.152: P2.B5 6.75,18.25 7,18.5 R6.2
NetP6_A4: P6.A4 P6.A9 P6.B4 P6.B9 | length 7.2
  Top Layer w0.152: P6.A9 5.695,4.7 5.1,4.7 4.3,5.5 4.3,8.5 5.1,9.3 5.695,9.3 P6.A4
NetP6_A5: P6.A5 R3.2 | length 2.2
  Top Layer w0.152: P6.A5 6.75,8.25 7,8.5 R3.2
NetP6_B5: P6.B5 R4.2 | length 2.2
  Top Layer w0.152: P6.B5 6.75,5.25 7,5.5 R4.2
NRST: P1.B10 P4.10 P5.10 | length 51.1
  Top Layer w0.152: v1(160.25,-35.5) P1.B10
  Bottom Layer w0.152: v1(124.05,-20.635) 124.685,-21.27 132.415,-21.27 v1(133.05,-20.635) 133.685,-21.27 146.02,-21.27 v1(160.25,-35.5)
SWCLK: P3.4 U2.36 | length 9.5
  Top Layer w0.152: v1(25,45.635) 25.25,45.385 U2.36
SWDIO: P3.2 U2.35 | length 9.6
  Top Layer w0.152: U2.35@25.745,36.25 25.745,45.11 v1(26.27,45.635)
TRACECLK: P1.A6 P4.12 | length 43.8
  Bottom Layer w0.152: v1(133.05,-19.365) 144.951,-19.365 165.086,-39.5 P1.A6
TRACED0: P1.A7 P4.14 | length 43.9
  Bottom Layer w0.152: v1(133.05,-18.095) 144.388,-18.095 164.793,-38.5 P1.A7
TRACED1: P1.A8 P4.16 | length 44
  Bottom Layer w0.152: v1(133.05,-16.825) 133.685,-17.46 144.46,-17.46 164.5,-37.5 P1.A8
TRACED2: P1.A9 P4.18 | length 44.1
  Bottom Layer w0.152: v1(133.05,-15.555) 133.685,-16.19 143.897,-16.19 164.207,-36.5 P1.A9
TRACED3: P1.A10 P4.20 | length 44.2
  Bottom Layer w0.152: v1(133.05,-14.285) 133.685,-14.92 143.334,-14.92 163.914,-35.5 P1.A10
UART_TX: P3.6 U2.29 | length 15
  Top Layer w0.152: v1(23.73,45.635) 24.595,46.5 27.75,46.5 28.75,45.5 U2.29
V3.3: C1.2 C8.2 P3.1 P7.2 P8.2 R1.2 R7.2 R8.2 U2.5 U2.6 U5.5 | length 5.2
  Top Layer w0.152: U2.5@27.25,27.375 v1(27.25,26) 27.75,26.5 U2.6@27.75,27.375
  Top Layer w0.4: v1(26.825,20.5) 27.05,20.275 U5.5
  other v1: 31.25,25 35,33.5 35,34.5 38.5,34.775 47.5,34.775 26.27,44.365
V5: C7.2 C9.2 C10.2 C11.2 LED1.2 LED2.2 P1.B1 P2.A4 P2.A9 P2.B4 P2.B9 R2.2 U4.5 U5.1 U5.3 | length 14.3
  Top Layer w0.152: LED2.2@2,31.5 C11.2 ; LED1.2@2,37.5 C10.2 ; U5.1 27.05,16.35 27.3,16.6 28.7,16.6 28.95,16.35 U5.3
  Top Layer w0.203: v1(9,34) 9.45,33.55 U4.5
  Top Layer w0.3: v1(164.75,-44.5) P1.B1
  Top Layer w0.4: v1(26.825,13.5) 27.05,13.725 U5.1
  other v1: 141,-20.5 6,17.6 6,22.4 2.025,31.475 2.025,37.475
VTREF: P1.A1 P4.1 P5.1 P9.1 | length 88.7
  Top Layer w0.152: P9.1 138.43,8.57 146.715,0.285 146.715,-25.715 ; v1(136.95,-25.715) 146.715,-25.715 ; v1(163.5,-42.5) 146.715,-25.715
  Bottom Layer w0.152: v1(127.95,-25.715) 128.585,-26.35 136.315,-26.35 v1(136.95,-25.715) ; v1(163.5,-42.5) 165.5,-44.5 P1.A1
pads on no net: LED2.3 LP1. LP2. P1.A18 P1.B18 P2. P2.A8 P2.B8 P3. P4.7 P5.7 P6. P6.A8 P6.B8 P9.2 P9.19 P9.20 U2.1 U2.2 U2.3 U2.4 U2.8 U2.9 U2.12 U2.14 U2.15 U2.16 U2.17 U2.18 U2.19 U2.20 U2.21 U2.24 U2.25 U2.26 U2.27 U2.28 U2.30 U2.31 U2.32 U2.37 U2.38 U2.39 U2.40 U2.41 U2.42 U2.43 U2.44 U2.45 U2.46 U2.47 U2.48 U4.1

## Polygon pours and split planes (outlines as drawn)
GND on Signal Layer 1 "GND_L02_P002" (solid, remove dead copper, pour order 2): 0,-50 170.5,-50 170.5,50 0,50
GND on Signal Layer 4 "GND_L05_P004" (solid, remove dead copper, pour order 4): 0,-50 170.5,-50 170.5,50 0,50
V5 on Signal Layer 3 "V5_L04_P008" (solid, remove dead copper, pour order 8): 0,50 0,-50 170.5,-50 170.5,50
GND on Top Layer "GND_L01_P010" (solid, remove dead copper, pour order 10): 0,47.5 163.6,47.5 163.6,50 0,50
GND on Top Layer "GND_L01_P012" (solid, remove dead copper, pour order 12): 0,-50 163.6,-50 163.6,-47.5 0,-47.5
GND on Bottom Layer "GND_L06_P014" (solid, remove dead copper, pour order 14): 0,47.5 163.6,47.5 163.6,50 0,50
GND on Bottom Layer "GND_L06_P016" (solid, remove dead copper, pour order 16): 0,-50 163.6,-50 163.6,-47.5 0,-47.5
V3.3 on Signal Layer 2 "V3.3_L03_P018" (solid, remove dead copper, pour order 18): 0,50 0,-50 170.5,-50 170.5,50

## Keep-outs
Keep-Out Layer:
  the board outline again, w0.254

## Other copper
Top Layer:
  text "1" at 162.25,45.75 h1.27
Signal Layer 1:
  pour cut-out: 163.6,47.25 161.5,47.25 161.5,38 163.6,38
  text "2" at 162,44.25 h1.27
Signal Layer 2:
  pour cut-out: 163.6,47.25 161.5,47.25 161.5,38 163.6,38
  text "3" at 162,42.75 h1.27
Signal Layer 3:
  pour cut-out: 163.6,47.25 161.5,47.25 161.5,38 163.6,38
  text "4" at 162,41.25 h1.27
Signal Layer 4:
  pour cut-out: 163.6,47.25 161.5,47.25 161.5,38 163.6,38
  text "5" at 162,39.75 h1.27
Bottom Layer:
  text "6" at 162,38.25 h1.27

## Silkscreen, mask and mechanical layers (free items; w line width, h text height)
Top Overlay:
  lines w0.2: 4.7,-36 61.7,-36 ; 4.7,-25.5 37.2,-25.5 ; 4.7,-4 37.2,-4 ; 40.2,-4 61.7,-4 ; 41.7,-21 41.7,-8.5 ; 66.2,-31.5 66.2,-8.5 ; 132.08,9.84 129.54,9.84 129.54,30.16 132.08,30.16
  text "GPIO7" at 139.7,27.94 h1.8
  text "GPIO6" at 139.7,25.4 h1.8
  text "GPIO5" at 139.7,22.86 h1.8
  text "GPIO4" at 139.7,20.32 h1.8
  text "GPIO3" at 139.7,17.78 h1.8
  text "GND" at 128.905,17.145 h1.8 r90
  text "GPIO2" at 139.7,15.24 h1.8
  text "GPIO1" at 139.7,12.7 h1.8
  text "GPIO0" at 139.7,10.16 h1.8
  text "VTREF" at 139.7,7.62 h1.8
Top Solder:
  rectangle: 0,47.5 163.6,50
  rectangle: 0,-50 163.6,-47.5
  rectangle: 161.5,38 163.6,47.5
Bottom Solder:
  rectangle: 0,-50 163.6,-47.5
  rectangle: 0,47.5 163.6,50
  rectangle: 161.5,38 163.6,47.5

## Text inside footprints (layer, text, board x,y; h text height)
P9: Top Overlay "2" at 134.238,6.03 h1.27 r90; Top Overlay "1" at 136.778,6.03 h1.27 r90; Top Overlay "19" at 136.778,32.954 h1.27 r90; Top Overlay "20" at 134.238,32.954 h1.27 r90